# EAGLE board Boczek_schm1 (EAGLE 9.6.2)

Size 83.49 x 20.31 mm. Coordinates in mm from the lower left corner, seen from the top.
Outline: 0,0 83.49,0 83.49,20.31 0,20.31 0,0
Copper layers (1*16): Top 0.035mm / dielectric 1.5mm / Bottom 0.035mm
Design rules "default": minimum track width 6mil, minimum drill 0.35mm, track to track 6mil, track to pad 6mil, pad to pad 6mil, via to via 6mil, smd to smd 6mil, copper to edge 40mil, drill to drill 6mil, minimum pad ring 10mil, minimum via ring 8mil, stop-mask expansion 4mil, vias tented up to drill 0mil, thermal gap 10mil

## Footprints (pad centres in the part's own frame; a part is rotated, then mirrored left to right if it is on the bottom)
SMC_E = smd 2.4 x 2.8: + -3.15,0; - 3.15,0
C1206 = smd 1.6 x 1.8: 1 -1.4,0; 2 1.4,0
C0603 = smd 1.1 x 1: 1 -0.85,0; 2 0.85,0
C0402 = smd 0.7 x 0.9: 1 -0.65,0; 2 0.65,0
QFN50P400X400X100-25N = smd 0.7 x 0.3: 1 -2.05,1.25; 2 -2.05,0.75; 3 -2.05,0.25; 4 -2.05,-0.25; 5 -2.05,-0.75; 6 -2.05,-1.25; 13 2.05,-1.25; 14 2.05,-0.75; 15 2.05,-0.25; 16 2.05,0.25; 17 2.05,0.75; 18 2.05,1.25 | smd 0.3 x 0.7: 7 -1.25,-2; 8 -0.75,-2; 9 -0.25,-2; 10 0.25,-2; 11 0.75,-2; 12 1.25,-2; 19 1.25,2; 20 0.75,2; 21 0.25,2; 22 -0.25,2; 23 -0.75,2; 24 -1.25,2 | smd 2.95 x 2.56: 25 0,0
SOT95P280X145-5N = smd 1.2 x 0.6: 1 -1.25,0.95; 2 -1.25,0; 3 -1.25,-0.95; 4 1.25,-0.95; 5 1.25,0.95
QFN50P400X400X85-21N = smd 0.95 x 0.3: 1 -1.9,1; 2 -1.9,0.5; 3 -1.9,0; 4 -1.9,-0.5; 5 -1.9,-1; 11 1.9,-1; 12 1.9,-0.5; 13 1.9,0; 14 1.9,0.5; 15 1.9,1 | smd 0.3 x 0.95: 6 -1,-1.9; 7 -0.5,-1.9; 8 0,-1.9; 9 0.5,-1.9; 10 1,-1.9; 16 1,1.9; 17 0.5,1.9; 18 0,1.9; 19 -0.5,1.9; 20 -1,1.9 | smd 2.5 x 2.5: 21 0,0
SOT230P700X180-4N = smd 1.75 x 0.95: 1 -3.15,2.3; 2 -3.15,0; 3 -3.15,-2.3 | smd 1.75 x 3.2: 4 3.15,0
SM-NE45 = smd 1.2 x 2.7: 1 -2.15,0; 2 2.15,0
LED3MM = drill 0.813 octagon: A -1.27,0; K 1.27,0
SOT23 = smd 1 x 1.4: 1 -0.95,-1.1; 2 0.95,-1.1; 3 0,1.1
R0603 = smd 1 x 1.1: 1 -0.85,0; 2 0.85,0
02P = drill 0.914 long: 1 -1.27,0; 2 1.27,0
J502-ND-142-0701-801/806 = smd 5.08 x 2.286: 1 2.565,0; G@1 2.565,4.42; G@2 2.565,-4.42 | smd 5.08 x 2.286 bottom: G@3 2.565,4.42; G@4 2.565,-4.42

## Placement (x,y rotation side)
C1  4.7uF  [SMC_E]  23.37,6.35 180 top
C2  22uF  [SMC_E]  16.89,16.51 0 top
C3  47nF  [C1206]  20.19,11.3 270 top
C4  10pF  [C0603]  50.8,15.24 0 top
C7  100nF  [C1206]  6.35,8.89 90 top
C8  10pF  [C0402]  67.31,10.16 0 top
C9  10pF  [C0402]  63.63,5.97 90 top
C10  2.2uF  [C0402]  -62.23,-10.16 0 top  (outside the outline)
C11  2.2uF  [C0402]  61.72,14.35 270 top
C12  2.2uF  [C0402]  60.58,14.35 270 top
C13  10pF  [C0402]  34.29,10.16 0 top
C14  1nF  [C0402]  58.67,7.24 90 top
IC1  HMC430LP4ETR  [QFN50P400X400X100-25N]  46.99,10.16 0 top
IC2  TPS613222ADBVR  [SOT95P280X145-5N]  10.16,15.24 0 top
IC3  RFPA5542BTR13  [QFN50P400X400X85-21N]  62.23,10.16 0 top
IC4  MCP1826S-3302E_DB  [SOT230P700X180-4N]  14.22,3.94 0 top
L1  2.2uH  [SM-NE45]  6.35,13.97 90 top
L2  4.7uH  [SM-NE45]  15.37,12.7 0 top
L3  1uH  [SM-NE45]  60.96,22.86 0 top
L4  4.7uH  [SM-NE45]  24.89,12.7 0 top
LED1  TLLR4400  [LED3MM]  72.64,2.92 90 top
LED2  TLLR4400  [LED3MM]  25.27,17.27 180 top
Q1  BC847  [SOT23]  67.94,4.06 270 top
R1  10k  [R0603]  65.28,5.97 270 top
R2  0  [R0603]  71.12,13.97 90 top
R3  1k  [R0603]  55.88,7.62 90 top
R4  [R0603]  45.72,13.97 0 top
R5  [R0603]  45.72,17.78 0 top
R6  10  [R0603]  55.88,25.4 0 top  (outside the outline)
R7  10  [R0603]  48.26,29.21 0 top  (outside the outline)
R8  100  [R0603]  -40.64,-16.51 0 top  (outside the outline)
R9  100k  [R0603]  -62.23,-24.13 0 top  (outside the outline)
R10  1k  [R0603]  29.08,16.38 90 top
R11  0  [R0603]  49.53,19.05 0 top
R12  0  [R0603]  48.68,3.81 0 top
SL1  [02P]  2.54,8.89 90 top
X1  SMA-142-0701-801/806  [J502-ND-142-0701-801/806]  82.93,10.16 180 top

## Library data of the parts
C1-C4 C7-C14 = rcl; SPICEPREFIX: C
IC1 = SamacSys_Parts; DESCRIPTION: VCO Oscillators VCO SMT w/Buffer amp, 5.0 - 5.5 GHz; HEIGHT: 1mm; MANUFACTURER_NAME: Analog Devices; MANUFACTURER_PART_NUMBER: HMC431LP4ETR; MOUSER_PART_NUMBER: 584-HMC430LP4ETR; MOUSER_PRICE-STOCK: https://www.mouser.co.uk/ProductDetail/Analog-Devices/HMC430LP4ETR?qs=pceeu5JH%2FH8gg6v6ve1tvQ%3D%3D
IC2 = SamacSys_Parts; DESCRIPTION: 6-uA Quiescent Current, 1.8-A Switch Current Boost Converter; HEIGHT: 1.45mm; MANUFACTURER_NAME: Texas Instruments; MANUFACTURER_PART_NUMBER: TPS613222ADBVR; MOUSER_PART_NUMBER: 595-TPS613222ADBVR; MOUSER_PRICE-STOCK: https://www.mouser.co.uk/ProductDetail/Texas-Instruments/TPS613222ADBVR?qs=W0yvOO0ixfE4d69WXsn8NQ%3D%3D
IC3 = SamacSys_Parts; DESCRIPTION: RF Amplifier 5GHZ Discrete PA; HEIGHT: 0.85mm; MANUFACTURER_NAME: Qorvo; MANUFACTURER_PART_NUMBER: RFPA5542BTR13; MOUSER_PART_NUMBER: 772-RFPA5542BTR13; MOUSER_PRICE-STOCK: https://www.mouser.co.uk/ProductDetail/Qorvo/RFPA5542BTR13?qs=u4fy%2FsgLU9OIcUWfOD%252Bf6g%3D%3D
IC4 = SamacSys_Parts; DESCRIPTION: LDO Regulator 1A 3.3V SOT223-3 MCP1826S-3302E/DB, Low Dropout Voltage Regulator, 1A, 3.3 V +/-2%, 2.3 6 Vin, 4-Pin SOT-223; HEIGHT: 1.8mm; MANUFACTURER_NAME: Microchip; MANUFACTURER_PART_NUMBER: MCP1826S-3302E/DB; MOUSER_PART_NUMBER: 579-MCP1826S-3302EDB; MOUSER_PRICE-STOCK: https://www.mouser.co.uk/ProductDetail/Microchip-Technology-Atmel/MCP1826S-3302E-DB?qs=gsqZ4L1luKqjUo%2Fe%2Fgllfg%3D%3D
L1 L3 L4 = inductor-neosid; OC_FARNELL: unknown; OC_NEWARK: unknown
L2 = inductor-neosid; OC_FARNELL: unknown; OC_NEWARK: unknown; SPICEPREFIX: L
LED1 LED2 = led; MF: VISHAY SEMICONDUCTOR; OC_FARNELL: 1612437
Q1 = transistor
R1-R3 R10-R12 = rcl; SPICEPREFIX: R
R4-R9 = resistor
SL1 = con-amp-quick; OC_FARNELL: unknown; OC_NEWARK: unknown
X1 = con-coax; MF: JOHNSON COMPONENTS; MPN: 142-0701-801; OC_FARNELL: 1608592; OC_NEWARK: 90F2624

## Nets
+3V3: C1.+ C4.2 IC1.20 IC4.3 R3.1 R12.2
+5V: L3.1 L4.2 LED1.A R10.1 R11.2
BAT+: C7.2 IC4.1 L1.1 SL1.2
BOOSTOUT: C2.+ IC2.4 L2.1
GND: C1.- C2.- C3.2 C4.1 C7.1 C9.1 C10.1 C11.1 C12.1 C14.1 IC1.15 IC1.25 IC2.2 IC3.2 IC3.4 IC3.11 IC3.12 IC3.14 IC3.15 IC3.16 IC3.17 IC3.21 IC4.2 IC4.4 LED2.K Q1.2 R4.1 R8.1 SL1.1 X1.G@1 X1.G@2 X1.G@3 X1.G@4
N$2: IC1.16 R6.1
N$3: R6.2 R7.1 R8.2
N$4: C13.1 IC3.3
N$5: LED2.A R10.2
N$7: IC2.1 L1.2
N$8: C13.2 R7.2
N$9: C11.2 IC3.19 R2.1
N$11: C10.2 C12.2 IC3.18 IC3.20 L3.2 R2.2
N$13: C9.2 IC3.10 R1.1
N$14: LED1.K Q1.3 R9.2
N$15: C3.1 L2.2 L4.1
N$16: Q1.1 R1.2 R9.1
N$17: C8.1 IC3.13
N$19: R5.2 R11.1
PA_EN: C14.2 IC3.5 R3.2
RF_OUT: C8.2 X1.1
VTUNE: IC1.22 R4.2 R5.1 R12.1

## Tracks (layer width: path | path; a pad name or v marks a point on that pad's centre or on a via)
+3V3  (5 unrouted)
+5V  (4 unrouted)
BAT+  (3 unrouted)
BOOSTOUT  (2 unrouted)
GND  (32 unrouted)
N$2  (1 unrouted)
N$3  (2 unrouted)
N$4  (1 unrouted)
N$5  (1 unrouted)
N$7  (1 unrouted)
N$8  (1 unrouted)
N$9  (2 unrouted)
N$11  (5 unrouted)
N$13  (2 unrouted)
N$14  (2 unrouted)
N$15  (2 unrouted)
N$16  (2 unrouted)
N$17  (1 unrouted)
N$19  (1 unrouted)
PA_EN  (2 unrouted)
RF_OUT  (1 unrouted)
VTUNE  (3 unrouted)
(copper drawn outside any net)
  shapes: Top area x2